# EAGLE board dev style rev0.1 (EAGLE 8.4.3)
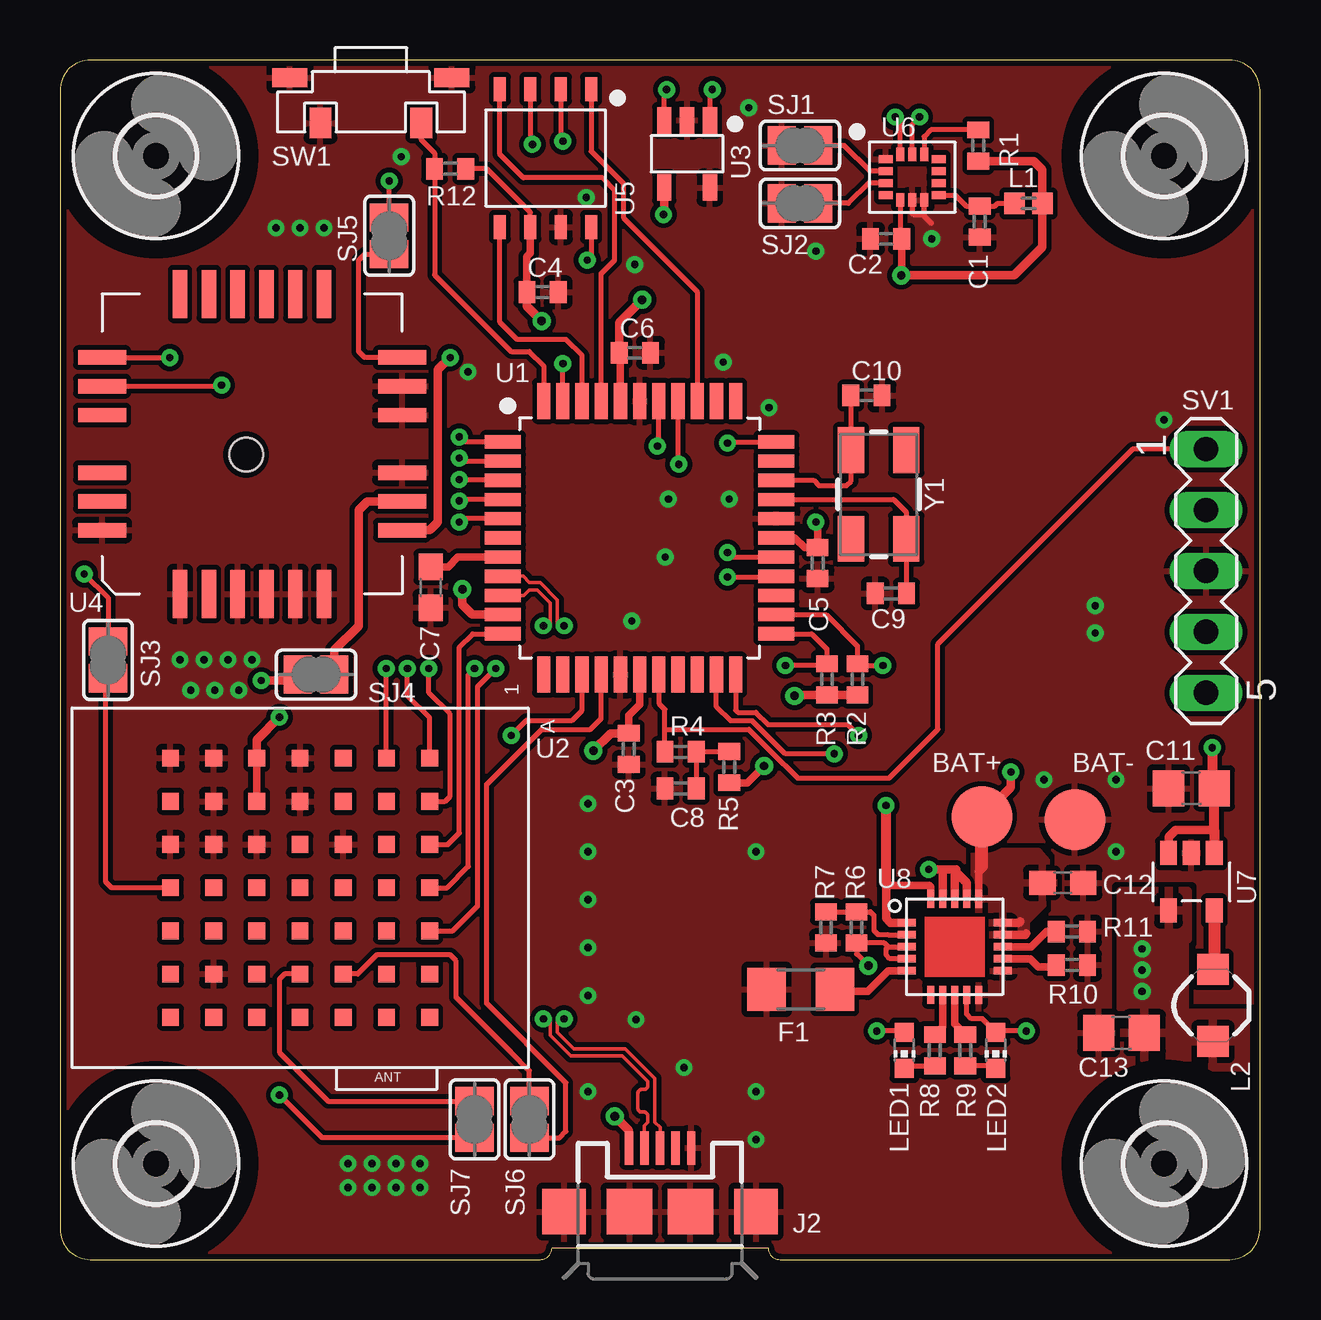
[diagram p0: board, top side]
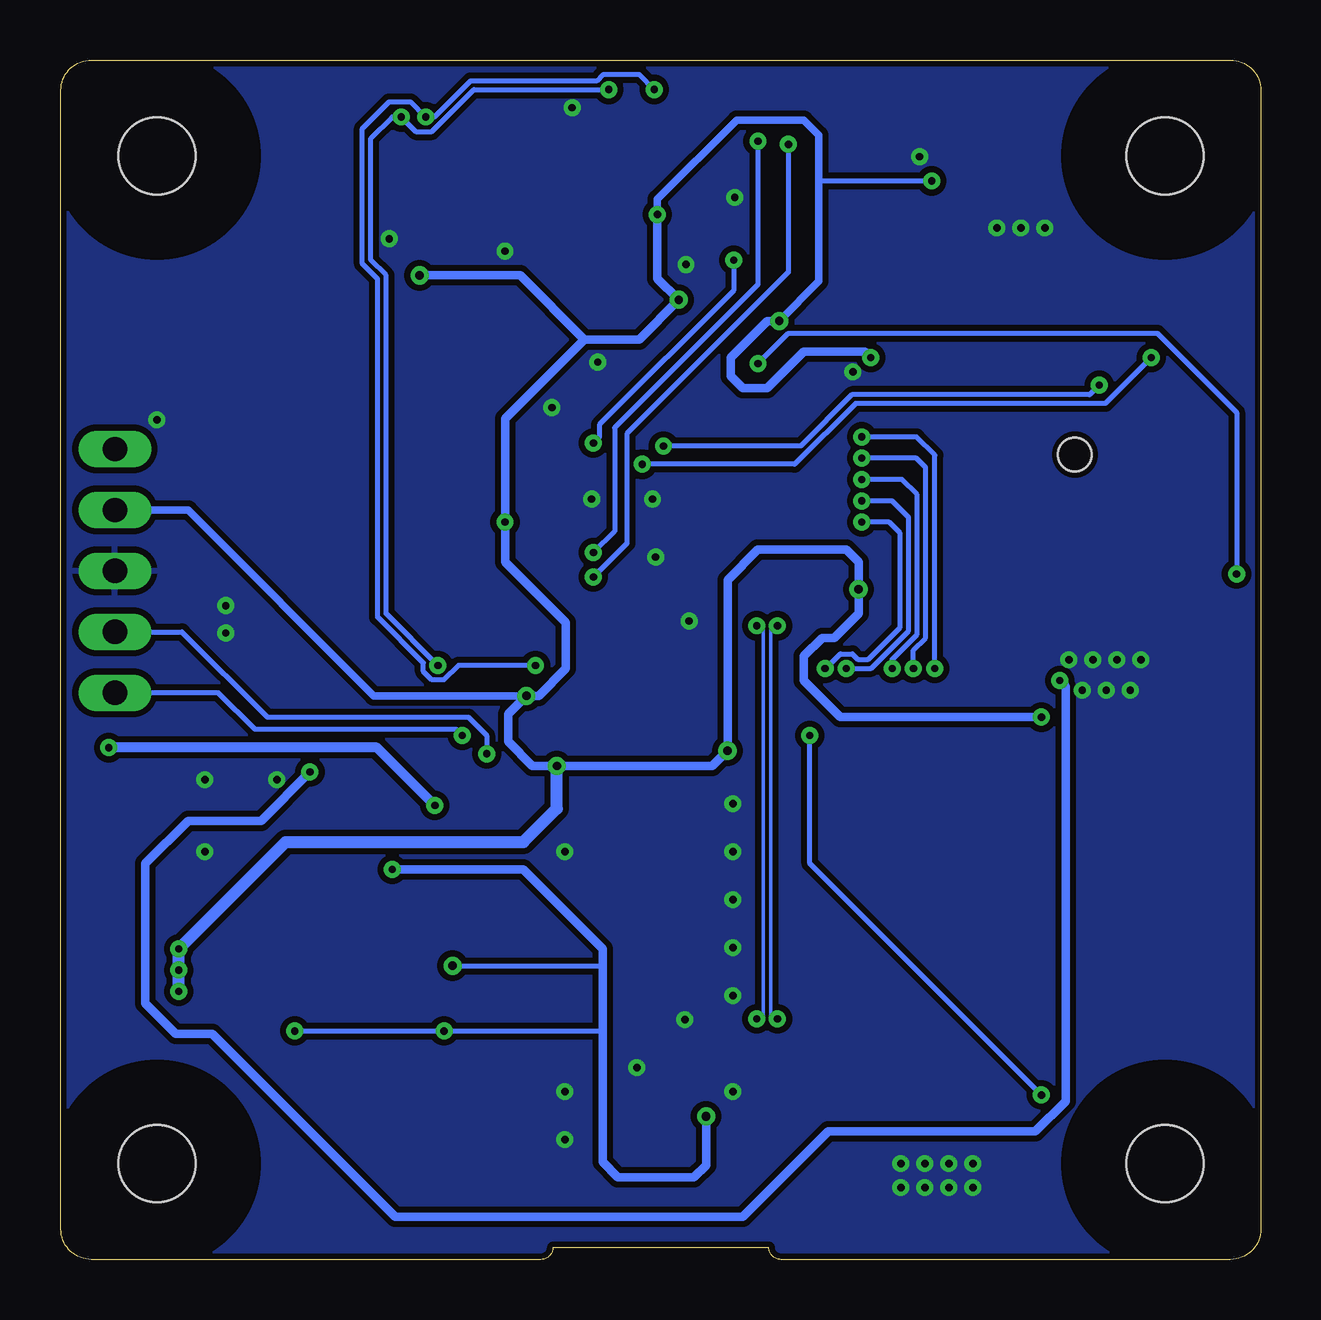
[diagram p1: board, bottom side, seen from below]

Size 50 x 50 mm. Coordinates in mm from the lower left corner, seen from the top.
Outline: 48.73,50 1.27,50 arc90 0,48.73 0,1.27 arc90 1.27,0 20,0 arc90 20.5,0.5 29.5,0.5 arc90 30,0 48.73,0 arc90 50,1.27 50,48.73 arc90 48.73,50
Copper layers (1*16): Top 0.035mm / dielectric 1.5mm / Bottom 0.035mm
Design rules "default *": minimum track width 6mil, minimum drill 0.3mm, track to track 6mil, track to pad 6mil, pad to pad 6mil, via to via 6mil, smd to smd 6mil, copper to edge 10mil, drill to drill 6mil, minimum pad ring 10mil, minimum via ring 8mil, stop-mask expansion 4mil, vias tented up to drill 0.3mm, thermal gap 10mil

## Footprints (pad centres in the part's own frame; a part is rotated, then mirrored left to right if it is on the bottom)
B2,54 = smd 2.54 x 2.54: TP 0,0
C0402 = smd 0.7 x 0.9: 1 -0.65,0; 2 0.65,0
C0603 = smd 1.1 x 1: 1 -0.85,0; 2 0.85,0
C0805 = smd 1.3 x 1.5: 1 -0.95,0; 2 0.95,0
R1206 = smd 1.6 x 1.803: 1 -1.422,0; 2 1.422,0
3,2 = hole 3.2: 0,0
USB-MICROB = smd 1.4 x 0.35: D+ -2.65,0; D- -2.65,-0.65; GND -2.65,1.3; ID -2.65,0.65; VBUS -2.65,-1.3 | smd 1.9 x 1.8: MT1 0,-4; MT2 0,4 | smd 1.9 x 1.9: P$1 0,-1.27; P$2 0,1.27
0402 = smd 0.85 x 0.9: 1 -0.58,0; 2 0.58,0
INDUCTOR_4.7UH = smd 1.3 x 1.3: P$1 -1.5,0; P$2 1.5,0
CHIP-LED0603 = smd 0.8 x 0.8: A 0,-0.75; C 0,0.75
R0402 = smd 0.7 x 0.9: 1 -0.65,0; 2 0.65,0
SJ = smd 1.168 x 1.6: 1 -0.762,0; 2 0.762,0
MA05-1 = drill 1.016 long: 1 -5.08,0; 2 -2.54,0; 3 0,0; 4 2.54,0; 5 5.08,0
BUTTON-TL3330AF130QG = smd 1.45 x 0.8: MNT@1 -3.375,-1; MNT@2 3.375,-1 | smd 0.9 x 1.27: SW1 -2.1,0.885; SW2 2.1,0.885
PIC24FJ128GB204 = smd 1.5 x 0.55: 1 -5.7,4; 2 -5.7,3.2; 3 -5.7,2.4; 4 -5.7,1.6; 5 -5.7,0.8; 6 -5.7,0; 7 -5.7,-0.8; 8 -5.7,-1.6; 9 -5.7,-2.4; 10 -5.7,-3.2; 11 -5.7,-4; 23 5.7,-4; 24 5.7,-3.2; 25 5.7,-2.4; 26 5.7,-1.6; 27 5.7,-0.8; 28 5.7,0; 29 5.7,0.8; 30 5.7,1.6; 31 5.7,2.4; 32 5.7,3.2; 33 5.7,4 | smd 0.55 x 1.5: 12 -4,-5.7; 13 -3.2,-5.7; 14 -2.4,-5.7; 15 -1.6,-5.7; 16 -0.8,-5.7; 17 0,-5.7; 18 0.8,-5.7; 19 1.6,-5.7; 20 2.4,-5.7; 21 3.2,-5.7; 22 4,-5.7; 34 4,5.7; 35 3.2,5.7; 36 2.4,5.7; 37 1.6,5.7; 38 0.8,5.7; 39 0,5.7; 40 -0.8,5.7; 41 -1.6,5.7; 42 -2.4,5.7; 43 -3.2,5.7; 44 -4,5.7
TELIT_RE866 = smd 0.7 x 0.7: A1 -5.4,5.4; A2 -3.6,5.4; A3 -1.8,5.4; A4 0,5.4; A5 1.8,5.4; A6 3.6,5.4; A7 5.4,5.4; B1 -5.4,3.6; B2 -3.6,3.6; B3 -1.8,3.6; B4 0,3.6; B5 1.8,3.6; B6 3.6,3.6; B7 5.4,3.6; C1 -5.4,1.8; C2 -3.6,1.8; C3 -1.8,1.8; C4 0,1.8; C5 1.8,1.8; C6 3.6,1.8; C7 5.4,1.8; D1 -5.4,0; D2 -3.6,0; D3 -1.8,0; D4 0,0; D5 1.8,0; D6 3.6,0; D7 5.4,0; E1 -5.4,-1.8; E2 -3.6,-1.8; E3 -1.8,-1.8; E4 0,-1.8; E5 1.8,-1.8; E6 3.6,-1.8; E7 5.4,-1.8; F1 -5.4,-3.6; F2 -3.6,-3.6; F3 -1.8,-3.6; F4 0,-3.6; F5 1.8,-3.6; F6 3.6,-3.6; F7 5.4,-3.6; G1 -5.4,-5.4; G2 -3.6,-5.4; G3 -1.8,-5.4; G4 0,-5.4; G5 1.8,-5.4; G6 3.6,-5.4; G7 5.4,-5.4
24LC32A-SOT23-5 = smd 0.6 x 1.1: 1 -0.95,-1.4; 2 0,-1.4; 3 0.95,-1.4; 4 0.95,1.4; 5 -0.95,1.4
TITAN-X1-GMS-3302 = smd 2 x 0.6: 1 -6.25,3; 2 -6.25,1.8; 3 -6.25,0.6; 4 -6.25,-0.6; 5 -6.25,-1.8; 6 -6.25,-3; 13 6.25,-3; 14 6.25,-1.8; 15 6.25,-0.6; 16 6.25,0.6; 17 6.25,1.8; 18 6.25,3 | smd 0.6 x 2: 7 -3.6,-6.25; 8 -2.4,-6.25; 9 -1.2,-6.25; 10 1.2,-6.25; 11 2.4,-6.25; 12 3.6,-6.25; 19 3.6,6.25; 20 2.4,6.25; 21 1.2,6.25; 22 -1.2,6.25; 23 -2.4,6.25; 24 -3.6,6.25 | hole 1.4: -0.45,0.25
AT45DB161E-SHD2B-T = smd 0.5 x 1: 1 -1.905,-2.875; 2 -0.635,-2.875; 3 0.635,-2.875; 4 1.905,-2.875; 5 1.905,2.875; 6 0.635,2.875; 7 -0.635,2.875; 8 -1.905,2.875
LSM6DSL = smd 0.575 x 0.35: 1 -1.1,0.75; 2 -1.1,0.25; 3 -1.1,-0.25; 4 -1.1,-0.75; 8 1.1,-0.75; 9 1.1,-0.25; 10 1.1,0.25; 11 1.1,0.75 | smd 0.35 x 0.575: 5 -0.5,-0.95; 6 0,-0.95; 7 0.5,-0.95; 12 0.5,0.95; 13 0,0.95; 14 -0.5,0.95
PAM2305AAB330 = smd 0.7 x 1: 1 -0.95,-1.2; 2 0,-1.2; 3 0.95,-1.2; 4 0.95,1.2; 5 -0.95,1.2
QFN20 = smd 0.75 x 0.3: 1 -2,1; 2 -2,0.5; 3 -2,0; 4 -2,-0.5; 5 -2,-1; 11 2,-1; 12 2,-0.5; 13 2,0; 14 2,0.5; 15 2,1 | smd 0.3 x 0.75: 6 -1,-2; 7 -0.5,-2; 8 0,-2; 9 0.5,-2; 10 1,-2; 16 1,2; 17 0.5,2; 18 0,2; 19 -0.5,2; 20 -1,2
CRYSTAL-SMD-5X3.2-4PAD = smd 1.9 x 1.1: 1 -1.85,-1.15; 2 1.85,-1.15; 3 1.85,1.15; 4 -1.85,1.15

## Placement (x,y rotation side)
BAT+  PTR1B2,54  [B2,54]  38.41,18.47 270 top
BAT-  PTR1B2,54  [B2,54]  42.29,18.34 270 top
C1  0.1uF  [C0402]  38.32,43.26 270 top
C2  0.1uF  [C0402]  34.42,42.55 180 top
C3  0.1uF  [C0402]  23.7,21.29 270 top
C4  0.1uF  [C0402]  20.11,40.33 0 top
C5  0.1uF  [C0402]  31.57,29.03 270 top
C6  0.1uF  [C0402]  23.95,37.8 0 top
C7  10uF  [C0603]  15.44,28.02 270 top
C8  0.1uF  [C0402]  25.86,19.64 180 top
C9  22pF  [C0402]  34.62,27.76 180 top
C10  22pF  [C0402]  33.6,36.02 0 top
C11  10uF  [C0805]  47.14,19.64 180 top
C12  10uF  [C0603]  41.78,15.71 0 top
C13  10uF  [C0805]  44.23,9.45 180 top
F1  15K  [R1206]  30.86,11.26 180 top
H1  MOUNT-HOLE3.2  [3,2]  4,46 0 top
H2  MOUNT-HOLE3.2  [3,2]  46,46 0 top
H3  MOUNT-HOLE3.2  [3,2]  46,4 0 top
H4  MOUNT-HOLE3.2  [3,2]  4,4 0 top
J2  [USB-MICROB]  25,2 270 top
L1  MPZ1608D300BTA00  [0402]  40.35,44.02 0 top
L2  4.7µH/±30%/1.2A  [INDUCTOR_4.7UH]  48.04,10.59 270 top
LED1  GREEN  [CHIP-LED0603]  35.18,8.72 180 top
LED2  ORANGE  [CHIP-LED0603]  38.99,8.72 180 top
R1  10K  [R0402]  38.26,46.43 270 top
R2  4.7K  [R0402]  33.22,24.18 270 top
R3  4.7K  [R0402]  31.95,24.18 270 top
R4  100R  [R0402]  25.86,21.16 180 top
R5  10K  [R0402]  27.89,20.52 270 top
R6  270K  [R0402]  33.19,13.84 270 top
R7  100K  [R0402]  31.92,13.84 90 top
R8  1K  [R0402]  36.45,8.72 270 top
R9  1K  [R0402]  37.72,8.72 270 top
R10  100K  [R0402]  42.16,12.28 180 top
R11  1K  [R0402]  42.16,13.68 180 top
R12  10K  [R0402]  16.26,45.47 0 top
SJ1  [SJ]  30.83,46.43 0 top
SJ2  [SJ]  30.83,44.02 0 top
SJ3  [SJ]  2,24.99 90 top
SJ4  [SJ]  10.67,24.38 0 top
SJ5  [SJ]  13.72,42.67 270 top
SJ6  [SJ]  19.56,5.84 90 top
SJ7  [SJ]  17.27,5.84 90 top
SV1  [MA05-1]  47.75,28.7 270 top
SW1  BUTTON-TL3330AF130QG  [BUTTON-TL3330AF130QG]  12.95,48.26 180 top
U1  PIC24FJ128GB204  [PIC24FJ128GB204]  24.15,30.08 0 top
U2  TELIT_RE866  [TELIT_RE866]  10,15.5 270 top
U3  24LC32A-SOT23-5  [24LC32A-SOT23-5]  26.13,46.09 180 top
U4  TITAN-X1-GMS-3302  [TITAN-X1-GMS-3302]  8,34 90 top
U5  AT45DB161E-SHD2B-T  [AT45DB161E-SHD2B-T]  20.23,45.91 180 top
U6  LSM6DSL  [LSM6DSL]  35.51,45.12 0 top
U7  PAM2305AAB330  [PAM2305AAB330]  47.14,15.74 180 top
U8  MCP73871  [QFN20]  37.28,13.04 0 top
Y1  16MHz  [CRYSTAL-SMD-5X3.2-4PAD]  34.11,31.89 270 top

## Library data of the parts
BAT+ BAT- = testpad
C1-C13 R1-R12 = resistor
F1 LED1 LED2 U8 = adafruit
H1-H4 = holes
J2 = SparkFun-Connectors; PROD_ID: CONN-09505; SF_ID: PRT-08533
L1 = SparkFun-Coils; PROD_ID: NDUC-13457
L2 = SparkFun-Coils; PROD_ID: NDUC-10146
SJ1-SJ7 = jumper
SV1 = con-lstb; OC_FARNELL: unknown; OC_NEWARK: unknown
SW1 U1-U5 U7 = clackboard_lib
U6 = clackboard_lib; SPICEPREFIX: X
Y1 = SparkFun-Clocks; PROD_ID: XTAL-08218; SF_ID: COM-00094

## Nets
3.3V: C2.1 C3.1 C4.1 C5.1 C6.1 C13.1 L1.2 L2.P$2 R1.2 R2.2 R3.2 R5.2 R12.2 SJ5.1 SV1.2 U1.10 U1.17 U1.28 U1.40 U2.E1 U2.E2 U3.4 U4.7 U5.6 U6.5 U7.4
5V: C11.1 U7.1 U7.3 U8.1 U8.20
BOOT0: SJ6.1 U1.15
BUTTON: R12.1 SW1.SW1 U1.44
CS: U1.41 U5.4
GND: BAT-.TP C1.2 C2.2 C3.2 C4.2 C5.2 C6.2 C7.2 C8.2 C9.2 C10.2 C11.2 C12.2 C13.2 F1.2 J2.GND J2.MT1 J2.MT2 J2.P$1 J2.P$2 R7.1 R10.1 R11.1 SJ1.1 SJ2.1 SV1.3 SW1.MNT@1 SW1.MNT@2 SW1.SW2 U1.16 U1.29 U1.39 U2.C3 U2.D1 U2.D2 U2.E3 U2.F1 U2.F2 U2.F3 U2.F6 U2.G1 U2.G3 U3.2 U3.5 U4.1 U4.3 U4.4 U4.5 U4.6 U4.9 U4.10 U4.11 U4.24 U5.7 U6.1 U6.6 U6.7 U7.2 U8.10 U8.11
INT1: U6.4
INT2: U6.9
IUR_IN: U1.3 U2.A2
IUR_OUT: U1.11 U2.A3
MCLR: R4.2 SV1.1 U1.18
MISO: U1.33 U5.8
MOSI: U1.36 U5.1
N$1: SJ1.2 U6.2
N$2: SJ2.2 U6.3
N$3: R1.1 U6.12
N$4: SJ4.2 U4.8
N$5: C1.1 L1.1 U6.8
N$6: C8.1 R4.1 R5.1
N$7: C9.1 U1.30 Y1.3
N$8: C10.1 U1.31 Y1.1
N$9: C7.1 U1.7
N$10: R6.1 R7.2 U8.2
N$11: SJ7.2 U2.D6
N$12: SJ6.2 U2.C6
N$13: LED1.C R8.2
N$14: LED2.C R9.2
N$15: R8.1 U8.7
N$16: R9.1 U8.8
N$17: L2.P$1 U7.5
N$18: SJ3.1 U2.G4
N$19: R10.2 U8.12
N$20: R11.2 U8.13
N$24: F1.1 U8.5
PGC: SV1.5 U1.22
PGD: SV1.4 U1.21
PIC_CTS: U1.2 U2.A1
PIC_RTS: U1.1 U2.B1
PIC_RX: U1.4 U2.A4
PIC_TX: U1.5 U2.A5
RESET: U1.26 U5.3
RX0: U1.38 U4.20
SCK: U1.27 U5.2
SCL: R2.1 U1.24 U3.1 U6.13
SDA: R3.1 U1.23 U3.3 U6.14
TELIT_RESET: SJ3.2 U1.43
TELIT_WAKEUP: SJ5.2 U4.12
TESTMODE: SJ7.1 U1.14
TX0: U1.37 U4.19
USB_N: J2.D- U1.9
USB_P: J2.D+ U1.8
V_USB: J2.VBUS LED1.A LED2.A R6.2 U8.3 U8.4 U8.9 U8.17 U8.18 U8.19
VBAT: BAT+.TP C12.1 SJ4.1 U8.14 U8.15 U8.16
WP: U1.42 U5.5

## Tracks (layer width: path | path; a pad name or v marks a point on that pad's centre or on a via)
3.3V  (via drill 0.3, 0.35)
  Top 0.203: U6.5 35.01,42.6 C2.1 | U5.6 19.59,43.65 17.78,45.47 R12.2 | SJ5.1 v13.72,44.96
  Top 0.305: C6.1 23.35,37.74 U1.40 | C4.1 19.46,41.81 19.59,41.95 U5.6 | U1.28 30.62,30.08 31.02,29.68 C5.1 31.57,30.66 v31.5,30.73 | U1.17 24.15,23.14 23.7,22.68 C3.1 | 35.01,41.07 v35.05,41.02 35.07,41.04 C2.1 | R5.2 28.64,19.87 v29.34,20.57 | U2.E2 U2.E1
  Top 0.356: R2.2 R3.2 30.64,23.53 v30.61,23.5 | v22.23,21.21 22.95,21.94 C3.1 | U1.10 17.19,26.88 16.76,27.3 v16.76,27.94 | v35.05,41.02 39.75,41.02 40.94,42.2 L1.2 | L1.2 41.02,43.94 | L1.2 40.94,45.42 40.58,45.78 R1.2 | C4.1 19.46,39.73 v20.07,39.12 | C6.1 23.3,39.05 v24.26,40.01 | v25.15,43.56 25.18,43.59 U3.4 | U2.E1 8.2,21.66 v9.14,22.61 | U4.7 15.41,30.4 15.75,30.73 15.75,37.08 v16.26,37.59
  Bottom 0.203: v13.72,44.96 18.41,44.96
  Bottom 0.305: v20.07,39.12 18.41,40.77 18.41,44.96 18.41,46.86 19.05,47.5 21.84,47.5 25.15,44.2 v25.15,43.56 | SV1.2 44.7,31.24 36.96,23.5 v30.61,23.5
  Bottom 0.356: 28.19,38.35 31.5,35.05 v31.5,30.73 31.5,29.08 28.96,26.54 28.96,24.64 30.1,23.5 v30.61,23.5 31.37,22.73 31.37,21.59 30.35,20.57 v29.34,20.57 22.86,20.57 v22.23,21.21 22.23,28.32 20.95,29.59 17.27,29.59 16.76,29.08 v16.76,27.94 16.76,26.92 17.78,25.91 18.29,25.91 19.05,25.15 19.05,24.13 17.53,22.61 v9.14,22.61 | 28.19,38.35 30.86,41.02 v35.05,41.02 | 28.19,38.35 25.91,38.35 v24.26,40.01 25.15,40.89 v25.15,43.56 | v16.26,37.59 16.51,37.85 19.05,37.85 20.57,36.32 21.59,36.32 22.1,36.83 22.1,37.59 20.57,39.12 v20.07,39.12
  Bottom 0.508: v45.09,11.18 v45.09,12.06 v45.09,12.95 40.64,17.4 30.73,17.4 29.34,18.8 v29.34,20.57
  pour Top (isolate 0.254): 44.2,8 49.4,8 49.4,10.29 46.86,10.29 46.86,13.34 46.99,13.34 46.99,15.37 44.2,15.37
5V  (via drill 0.3)
  Top 0.305: U8.20 36.28,15.54 36.22,15.6 34.44,15.6 34.42,15.62
  Top 0.356: U8.1 34.6,14.04 34.42,14.22 34.42,15.62 | U7.3 46.19,17.61 46.48,17.91 48.09,17.91
  Top 0.406: 34.42,15.62 v34.42,18.92 | v48.01,21.34 48.01,19.47 C11.1 48.09,17.91 U7.1
  Bottom 0.406: v34.42,18.92 36.83,21.34 v48.01,21.34
BOOT0
  Top 0.203: U1.15 22.55,22.55 22.1,22.1 20.07,22.1 17.78,19.81 17.78,10.67 21.08,7.37 21.08,5.33 20.83,5.08 SJ6.1
BUTTON
  Top 0.203: U1.44 20.15,37.25 19.56,37.85 18.8,37.85 15.61,41.04 R12.1 15.61,46.12 15.05,46.67 SW1.SW1
CS
  Top 0.203: U1.41 22.55,41.09 23.11,41.66 23.11,44.58 22.61,45.09 19.3,45.09 18.32,46.06 U5.4
GND  (via drill 0.3)
  Top 0.203: 36.01,43.56 U6.7 | 36.01,43.56 36.01,43.49 36.31,43.2 | U6.6 35.51,43.61 35.56,43.56 36.01,43.56
  other vias: 14.22,45.97 31.5,42.04 36.32,42.55 28.7,48.01 7.44,23.73 5.44,23.73 8,25 6,25 6.44,23.73 7,25 5,25 9,43 10,43 11,43 17,37 22,11 22,13 22,15 22,17 22,19 24,10 26,8 22,7 29,7 29,5 29,17 44,20 44,17 41,20 46,35 12,4 13,4 13,3 12,3 14,4 15,4 15,3 14,3 29.54,35.51 27.64,37.41 27.89,31.7 25.35,31.7 23.83,26.62 25.22,29.28 43.13,26.11 43.13,27.25 21.92,44.27 23.95,41.48
  pour Bottom (isolate 0.254, rank 2): 0,0 0,50 50,50 50,0
  pour Top (isolate 0.203, rank 2): 50,0 50,50 0,50 0,0
IUR_IN  (via drill 0.3)
  Top 0.203: U1.3 16.67,32.48 v16.64,32.51 | U2.A2 16.05,19.1 16.26,19.3 16.26,22.73 15.37,23.62 v15.37,24.64
  Bottom 0.203: v15.37,24.64 15.37,25.01 14.33,26.05 14.33,31.88 14.96,32.51 v16.64,32.51
IUR_OUT
  Top 0.203: U2.A3 16.16,17.3 16.64,17.78 16.64,25.53 17.19,26.08 U1.11
MCLR
  Top 0.203: U1.18 24.95,23.18 25.2,22.93 25.2,22.1 | R4.2 25.2,22.1 | SV1.1 44.7,33.78 36.58,25.65 36.58,22.1 34.54,20.07 30.74,20.07 29.6,21.21 29.59,21.21 28.7,22.1 25.2,22.1
MISO  (via drill 0.3)
  Top 0.203: U5.8 22.14,41.82 v21.97,41.66 | v27.81,34.04 27.86,34.08 U1.33
  Bottom 0.203: v21.97,41.66 21.97,40.39 27.56,34.8 27.56,34.29 v27.81,34.04
MOSI
  Top 0.203: U5.1 22.14,46.19 23.47,44.86 23.47,43.43 26.55,40.35 U1.36
N$1
  Top 0.203: U6.2 33.76,45.37 32.69,46.43 SJ1.2
N$2
  Top 0.203: U6.3 33.69,44.87 32.84,44.02 SJ2.2
N$3
  Top 0.203: R1.1 36.29,47.08 36.01,46.8 U6.12
N$4
  Top 0.356: SJ4.2 11.43,25.4 12.45,26.42 12.45,31.24 12.8,31.6 U4.8
N$5
  Top 0.203: U6.8 37.3,44.37 37.75,43.91 C1.1 38.96,43.91 39.07,44.02 L1.1
N$6
  Top 0.203: C8.1 R4.1 27.87,21.16 R5.1
N$7
  Top 0.203: U1.30 34.74,31.68 35.26,31.16 Y1.3 35.26,27.77 C9.1
N$8
  Top 0.203: U1.31 31.4,32.48 31.62,32.26 32.77,32.26 32.96,32.45 Y1.1 C10.1
N$9
  Top 0.305: U1.7 16.58,29.28 16.17,28.87 C7.1
N$10
  Top 0.203: R7.2 R6.1 33.77,14.49 33.91,14.35 33.91,13.72 34.08,13.55 34.5,13.55 34.51,13.54 U8.2
N$11
  Top 0.203: U2.D6 9.36,11.9 9.14,11.68 9.14,8.64 11.18,6.6 SJ7.2
N$12
  Top 0.203: SJ6.2 19.56,7.87 18.8,8.64 16.51,10.92 16.51,12.45 16.26,12.7 13.21,12.7 12.41,11.9 U2.C6
N$13
  Top 0.203: LED1.C 35.28,8.07 R8.2
N$14
  Top 0.203: LED2.C 38.89,8.07 R9.2
N$15
  Top 0.305: U8.7 36.78,9.7 R8.1
N$16
  Top 0.305: U8.8 37.28,9.82 R9.1
N$17
  Top 0.508: U7.5 48.09,12.14 L2.P$1
N$18
  Top 0.203: U2.G4 2.15,15.5 1.91,15.75 1.91,24.64 SJ3.1
N$19
  Top 0.305: U8.12 40.42,12.54 40.77,12.19 41.43,12.19 R10.2
N$20
  Top 0.305: U8.13 40.47,13.04 41.11,13.68 R11.2
N$24
  Top 0.305: U8.5 34.52,12.04 33.66,11.18 32.37,11.18 F1.1
PGC  (via drill 0.3)
  Top 0.203: U1.22 28.15,22.9 28.25,22.81 29,22.81 29.5,22.3 32.82,22.3 v33.27,21.84
  Bottom 0.203: v33.27,21.84 33.53,22.1 41.91,22.1 43.43,23.62 SV1.5
PGD  (via drill 0.3)
  Top 0.203: U1.21 27.35,23.04 27.94,22.45 28.85,22.45 29.74,21.56 29.75,21.56 30.23,21.08 v32.26,21.08
  Bottom 0.203: SV1.4 44.96,26.16 41.4,22.61 33.02,22.61 32.26,21.84 v32.26,21.08
PIC_CTS  (via drill 0.3)
  Top 0.203: v16.64,33.4 16.76,33.28 U1.2 | U2.A1 15.4,22.57 14.48,23.5 v14.48,24.64
  Bottom 0.203: v14.48,24.64 14.48,25.4 13.97,25.91 13.97,33.02 14.35,33.4 v16.64,33.4
PIC_RTS  (via drill 0.3)
  Top 0.203: U2.B1 13.59,20.91 v13.59,24.64 | v16.64,34.29 16.84,34.08 U1.1
  Bottom 0.203: v13.59,24.64 13.59,33.53 14.35,34.29 v16.64,34.29
PIC_RX  (via drill 0.3)
  Top 0.203: U1.4 16.7,31.68 v16.64,31.62 | U2.A4 16.14,15.5 17.02,16.38 17.02,24.38 v17.27,24.64
  Bottom 0.203: v17.27,24.64 16.25,24.64 14.68,26.2 14.68,30.94 15.37,31.62 v16.64,31.62
PIC_TX  (via drill 0.3)
  Top 0.203: U1.5 16.79,30.88 v16.64,30.73 | U2.A5 16.37,13.7 17.4,14.73 17.4,23.88 v18.16,24.64
  Bottom 0.203: v18.16,24.64 18.13,24.64 17.52,25.25 17.02,25.25 16.79,25.02 16.37,25.02 15.04,26.35 15.04,30.28 15.49,30.73 v16.64,30.73
RESET  (via drill 0.3)
  Top 0.203: U5.3 19.59,46.57 v19.68,46.48 | v27.81,28.45 29.82,28.45 U1.26
  Bottom 0.203: v19.68,46.48 19.68,41.15 26.42,34.42 26.42,29.84 v27.81,28.45
RX0  (via drill 0.3)
  Top 0.203: U4.20 6.68,36.4 v6.73,36.45 | v24.89,33.91 24.95,33.97 U1.38
  Bottom 0.203: v6.73,36.45 7.14,36.04 17.04,36.04 19.17,33.91 v24.89,33.91
SCK  (via drill 0.3)
  Top 0.203: U5.2 20.86,46.7 v20.95,46.61 | v27.81,29.46 28,29.28 U1.27
  Bottom 0.203: v20.95,46.61 20.95,40.64 26.92,34.67 26.92,30.35 v27.81,29.46
SCL  (via drill 0.3)
  Top 0.203: U1.24 31.92,26.88 33.22,25.58 R2.1 33.29,24.77 v34.29,24.77 | U6.13 35.51,47.32 v35.81,47.62 | v27.18,48.77 27.08,48.67 U3.1
  Bottom 0.203: v34.29,24.77 36.45,26.92 36.45,41.02 37.08,41.66 37.08,46.74 36.2,47.62 v35.81,47.62 35.21,47.02 34.55,47.02 32.8,48.77 v27.18,48.77
SDA  (via drill 0.3)
  Top 0.203: U1.23 31.32,26.08 31.95,25.45 R3.1 31.89,24.77 v30.23,24.77 | U6.14 35.01,47.41 v34.8,47.62 | U3.3 25.18,48.67 v25.27,48.77
  Bottom 0.203: v30.23,24.77 33.43,24.77 34.04,24.16 34.54,24.16 34.9,24.51 34.9,24.87 36.8,26.78 36.8,40.87 37.44,41.51 37.44,47.14 36.32,48.26 35.43,48.26 v34.8,47.62 34.44,47.62 32.94,49.12 27.68,49.12 27.43,49.38 25.88,49.38 v25.27,48.77
TELIT_RESET  (via drill 0.3)
  Top 0.203: U1.43 v20.95,37.34 | v1.02,28.57 2,27.59 SJ3.2
  Bottom 0.203: v20.95,37.34 19.68,38.61 4.32,38.61 1.02,35.31 v1.02,28.57
TELIT_WAKEUP
  Top 0.203: U4.12 12.69,37.6 12.45,37.85 12.45,41.66 12.7,41.91 SJ5.2
TESTMODE  (via drill 0.3)
  Top 0.203: v18.8,21.84 19.43,22.48 21.34,22.48 21.75,22.89 U1.14 | SJ7.1 10.92,5.08 v9.14,6.86
  Bottom 0.203: v9.14,6.86 18.8,16.51 v18.8,21.84
TX0  (via drill 0.3)
  Top 0.203: U4.19 v4.56,37.6 v4.57,37.59 | v25.78,33.15 25.75,33.18 U1.37
  Bottom 0.203: v4.57,37.59 6.48,35.69 16.89,35.69 19.43,33.15 v25.78,33.15
USB_N  (via drill 0.3)
  Top 0.152: J2.D- 24.35,5.58 24.49,5.71 24.49,6 arc90 24.33,6.15 24.23,6.15 arc-90 24.08,6.3 24.08,6.93 arc-90 24.23,7.09 24.33,7.09 arc90 24.49,7.24 24.49,7.43 23.43,8.48 21.27,8.48 20.42,9.34 20.42,10.03 v20.14,10.03 | v20.14,26.42 20.42,26.42 20.42,27.37 19.88,27.91 19.56,27.91 19.32,27.68 U1.9
  Bottom 0.152: v20.14,10.03 20.42,10.03 20.42,26.42 v20.14,26.42
USB_P  (via drill 0.3)
  Top 0.152: J2.D+ 25,5.5 24.79,5.71 24.79,7.56 23.56,8.79 21.4,8.79 20.73,9.46 20.73,10.03 v21,10.03 | v21,26.42 20.73,26.42 20.73,27.5 20,28.22 19.56,28.22 19.3,28.48 U1.8
  Bottom 0.152: v21,10.03 20.73,10.03 20.73,26.42 v21,26.42
V_USB  (via drill 0.3, 0.35, 0.36)
  Top 0.203: U8.9 37.78,10.23 37.97,10.03 38.43,10.03 LED2.A 39.04,9.53 v40.26,9.53 | LED1.A 35.13,9.53 v34.04,9.53 | U8.4 34.58,12.54 34.42,12.7 34.42,12.95 34.5,13.04 | 34.5,13.04 U8.3 | 34.5,13.04 34.35,13.19 R6.2 33.19,12.73 v33.68,12.24
  Top 0.356: J2.VBUS 23.7,5.38 v23.11,5.97 | 36.7,16.26 v36.2,16.26 | 36.7,16.26 37.34,16.26 37.28,16.19 | 37.28,16.19 U8.18 | 36.7,16.26 36.78,16.18 U8.19 | U8.17 37.78,15.69 37.28,16.19
  Bottom 0.203: v40.26,9.53 v34.04,9.53 27.56,9.53 27.43,9.4 | v33.68,12.24 27.46,12.24 27.43,12.22
  Bottom 0.356: v23.11,5.97 23.11,3.94 23.62,3.43 26.8,3.43 27.43,4.06 27.43,9.4 27.43,12.22 27.43,12.95 30.73,16.26 v36.2,16.26
VBAT  (via drill 0.3)
  Top 0.305: U8.16 38.28,17.94 38.48,18.14
  Top 0.356: U8.15 39.95,14.04 40.01,14.1 | U8.14 40.21,13.54 40.26,13.59 | 38.28,16.18 38.48,16.38 38.48,18.14 BAT+.TP 39.62,19.68 v39.62,20.32 | SJ4.1 9.65,24.13 v8.38,24.13
  Bottom 0.356: v8.38,24.13 8.13,23.88 8.13,6.6 9.4,5.33 18.03,5.33 21.59,1.78 36.07,1.78 43.69,9.4 45.21,9.4 46.48,10.67 46.48,16.51 44.7,18.29 41.66,18.29 v39.62,20.32
  pour Top: 38.86,13.34 39.88,13.34 40.26,13.72 40.26,14.1 41.4,15.24 41.4,16.26 40.77,17.02 38.1,17.02 38.1,14.61 38.86,13.84
WP
  Top 0.203: U1.42 21.75,37.68 21.08,38.35 19.05,38.35 18.32,39.08 U5.5

## Text on the board
tDocu: ANT
bDocu: GPS